# Altium PCB ESP_Grow_Main_Rev_B.PcbDoc (part 2 of 2)
Units mm, origin at the board's own origin, x right, y up, seen from the top; angles counter-clockwise.
Board outline 80 x 80 mm, 4 copper layers (Top Copper, GND, Power, Bottom Copper), stack 1.57 mm thick; 66 components, 30 nets, 190 pads, 293 vias.
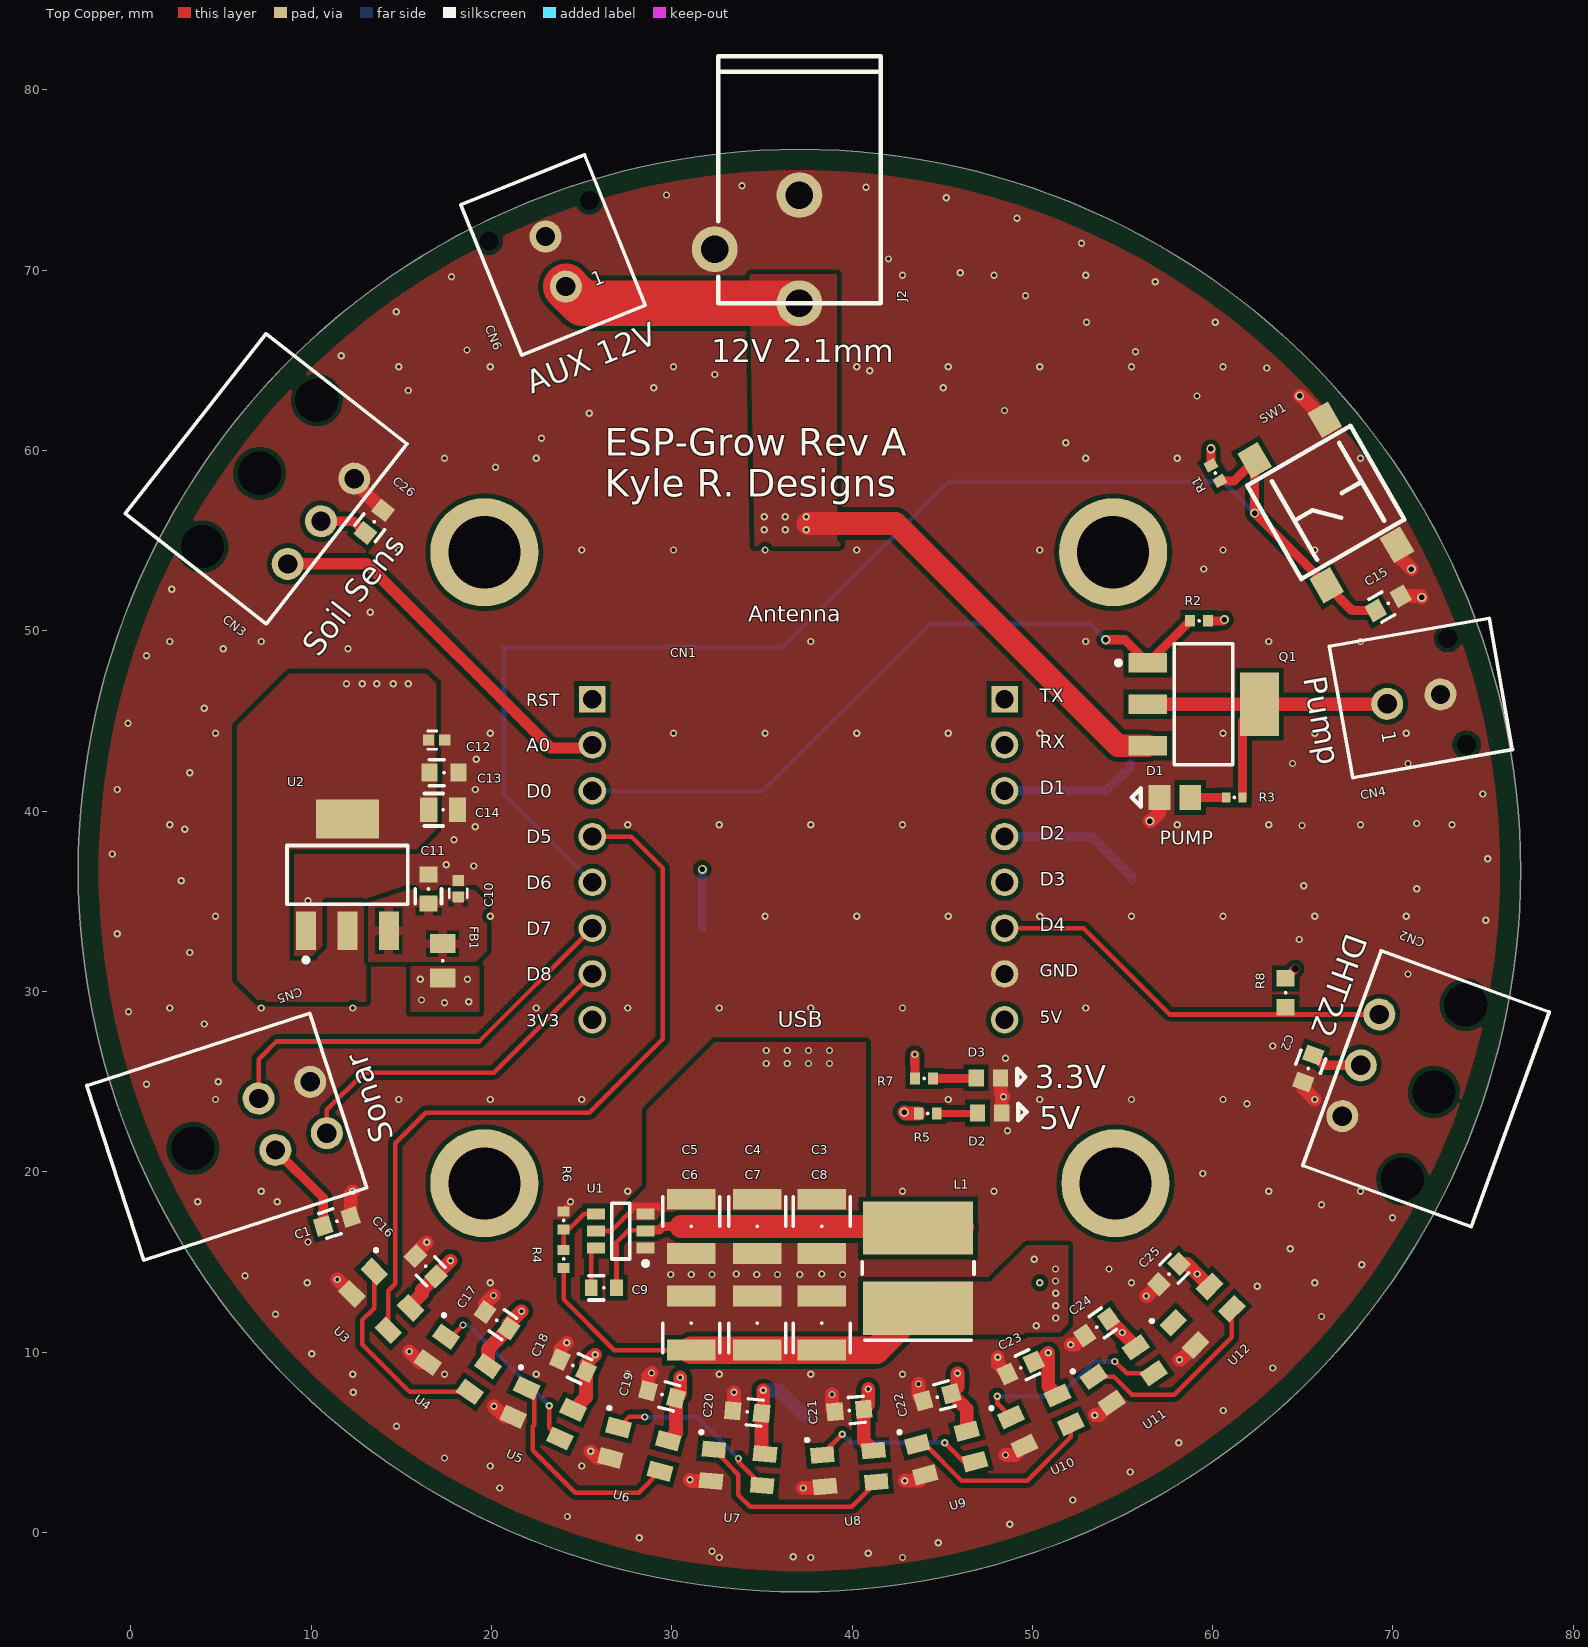
[diagram p0: Top Copper view]

## Silkscreen, mask and mechanical layers (free items; w line width, h text height) (continued)
Mechanical 1: (continued)
  text "1.38mil" at 42.34,93.662 h1.52
  text "10" at -13.525,90.614 h1.52
  text "Bottom Mask" at -3.114,90.614 h1.52
  text "Solder Resist" at 20.502,90.614 h1.52
  text "0.59mil" at 42.34,90.614 h1.52
  text "3.8" at 58.846,90.614 h1.52
  text "11" at -13.525,87.566 h1.52
  text "Bottom Overlay" at -3.114,87.566 h1.52
  text "10mm" at 62.55,-5.5 h1.52
Drill Drawing:
  circle w0.254: c-12.684,155.469 r0.508
  circle w0.254: c-12.684,155.469 r0.847
  circle w0.254: c-12.684,147.849 r0.847
  lines w0.254: -13.531,132.186 -13.107,132.186 -12.684,131.762 -12.261,132.186 -11.837,132.186 -12.261,132.609 -11.837,133.032 -12.261,133.032 -12.684,133.456 -13.107,133.032 -13.531,133.032 -13.107,132.609 -13.531,132.186 ; -13.531,135.996 -13.107,135.996 -13.107,135.572 -12.261,135.572 -12.261,135.996 -11.837,135.996 -11.837,136.842 -12.261,136.842 -12.261,137.266 -13.107,137.266 -13.107,136.842 -13.531,136.842 -13.531,135.996 ; -13.531,139.382 -11.837,139.382 -11.837,141.076 -13.531,141.076 -13.531,139.382 ; -13.531,143.192 -12.684,143.616 -11.837,143.192 -12.261,144.039 -11.837,144.886 -12.684,144.462 -13.531,144.886 -13.107,144.039 -13.531,143.192 ; -13.531,150.812 -13.531,151.236 -13.107,151.659 -13.531,152.082 -13.531,152.506 -13.107,152.506 -12.684,152.082 -12.261,152.506 -11.837,152.506 -11.837,152.082 -12.261,151.659 -11.837,151.236 -11.837,150.812 -12.261,150.812 -12.684,151.236 -13.107,150.812 -13.531,150.812 ; -13.531,159.279 -12.684,158.433 -11.837,159.279 -12.684,160.126 -13.531,159.279 ; -13.531,163.936 -11.837,163.936 -12.684,162.243 -13.531,163.936 ; -13.531,166.052 -11.837,166.052 -11.837,167.746 -13.531,167.746 -13.531,166.052 ; -13.192,166.391 -12.176,166.391 -12.176,167.407 -13.192,167.407 -13.192,166.391
  lines w0.381: -15.05,130.619 265.898,130.619 ; -15.05,168.719 265.898,168.719 ; -1.057,126.809 -1.057,172.529 ; 13.925,126.809 13.925,172.529 ; 43.126,126.809 43.126,172.529 ; 55.975,126.809 55.975,172.529 ; 74.614,126.809 74.614,172.529 ; 115.75,126.809 115.75,172.529 ; 130.732,126.809 130.732,172.529 ; 149.675,126.809 149.675,172.529 ; 175.322,126.809 175.322,172.529 ; 197.007,126.809 197.007,172.529 ; 230.881,126.809 230.881,172.529 ; -15.05,126.809 265.898,126.809 265.898,172.529 -15.05,172.529 -15.05,126.809
  text "Symbol" at -12.763,169.862 h1.83
  text "Count" at 0.086,169.862 h1.83
  text "Hole Size" at 15.068,169.862 h1.83
  text "Plated" at 44.269,169.862 h1.83
  text "Hole Type" at 57.118,169.862 h1.83
  text "Drill Layer Pair" at 75.757,169.862 h1.83
  text "Via/Pad" at 116.893,169.862 h1.83
  text "Pad Shape" at 131.875,169.862 h1.83
  text "Template" at 150.818,169.862 h1.83
  text "Description" at 176.465,169.862 h1.83
  text "Hole Tolerance (+)" at 198.15,169.862 h1.83
  text "Hole Tolerance (-)" at 232.024,169.862 h1.83
  text "1" at 0.086,166.052 h1.52
  text "0.406mm (16.00mil)" at 15.068,166.052 h1.52
  text "PTH" at 44.269,166.052 h1.52
  text "Round" at 57.118,166.052 h1.52
  text "Top Copper - Bottom Copper" at 75.757,166.052 h1.52
  text "Via" at 116.893,166.052 h1.52
  text "Rounded" at 131.875,166.052 h1.52
  text "v41h41" at 150.818,166.052 h1.52
  text "1" at 0.086,162.243 h1.52
  text "2.410mm (94.88mil)" at 15.068,162.243 h1.52
  text "NPTH" at 44.269,162.243 h1.52
  text "Round" at 57.118,162.243 h1.52
  text "Top Copper - Bottom Copper" at 75.757,162.243 h1.52
  text "Pad" at 116.893,162.243 h1.52
  text "Rounded" at 131.875,162.243 h1.52
  text "c0hn241" at 150.818,162.243 h1.52
  text "3" at 0.086,158.433 h1.52
  text "1.524mm (60.00mil)" at 15.068,158.433 h1.52
  text "PTH" at 44.269,158.433 h1.52
  text "Round" at 57.118,158.433 h1.52
  text "Top Copper - Bottom Copper" at 75.757,158.433 h1.52
  text "Pad" at 116.893,158.433 h1.52
  text "Rounded" at 131.875,158.433 h1.52
  text "c254h152" at 150.818,158.433 h1.52
  text "4" at 0.086,154.623 h1.52
  text "1.067mm (42.00mil)" at 15.068,154.623 h1.52
  text "NPTH" at 44.269,154.623 h1.52
  text "Round" at 57.118,154.623 h1.52
  text "Top Copper - Bottom Copper" at 75.757,154.623 h1.52
  text "Pad" at 116.893,154.623 h1.52
  text "Rounded" at 131.875,154.623 h1.52
  text "c0hn107" at 150.818,154.623 h1.52
  text "4" at 0.086,150.812 h1.52
  text "4.000mm (157.48mil)" at 15.068,150.812 h1.52
  text "PTH" at 44.269,150.812 h1.52
  text "Round" at 57.118,150.812 h1.52
  text "Top Copper - Bottom Copper" at 75.757,150.812 h1.52
  text "Pad" at 116.893,150.812 h1.52
  text "Rounded" at 131.875,150.812 h1.52
  text "c600h400(Tol0-0)" at 150.818,150.812 h1.52
  text "0.000mm (0.00mil)" at 198.15,150.812 h1.52
  text "0.000mm (0.00mil)" at 232.024,150.812 h1.52
  text "6" at 0.086,147.002 h1.52
  text "2.400mm (94.50mil)" at 15.068,147.002 h1.52
  text "NPTH" at 44.269,147.002 h1.52
  text "Round" at 57.118,147.002 h1.52
  text "Top Copper - Bottom Copper" at 75.757,147.002 h1.52
  text "Pad" at 116.893,147.002 h1.52
  text "Rounded" at 131.875,147.002 h1.52
  text "c0hn240" at 150.818,147.002 h1.52
  text "10" at 0.086,143.192 h1.52
  text "0.305mm (12.00mil)" at 15.068,143.192 h1.52
  text "PTH" at 44.269,143.192 h1.52
  text "Round" at 57.118,143.192 h1.52
  text "Top Copper - Bottom Copper" at 75.757,143.192 h1.52
  text "Via" at 116.893,143.192 h1.52
  text "Rounded" at 131.875,143.192 h1.52
  text "v51h30" at 150.818,143.192 h1.52
  text "14" at 0.086,139.382 h1.52
  text "1.067mm (42.00mil)" at 15.068,139.382 h1.52
  text "PTH" at 44.269,139.382 h1.52
  text "Round" at 57.118,139.382 h1.52
  text "Top Copper - Bottom Copper" at 75.757,139.382 h1.52
  text "Pad" at 116.893,139.382 h1.52
  text "Rounded" at 131.875,139.382 h1.52
  text "c178h107" at 150.818,139.382 h1.52
  text "16" at 0.086,135.572 h1.52
  text "1.016mm (40.00mil)" at 15.068,135.572 h1.52
  text "PTH" at 44.269,135.572 h1.52
  text "Round" at 57.118,135.572 h1.52
  text "Top Copper - Bottom Copper" at 75.757,135.572 h1.52
  text "Pad" at 116.893,135.572 h1.52
  text "(Mixed)" at 131.875,135.572 h1.52
  text "(Mixed)" at 150.818,135.572 h1.52
  text "282" at 0.086,131.762 h1.52
  text "0.203mm (8.00mil)" at 15.068,131.762 h1.52
  text "PTH" at 44.269,131.762 h1.52
  text "Round" at 57.118,131.762 h1.52
  text "Top Copper - Bottom Copper" at 75.757,131.762 h1.52
  text "Via" at 116.893,131.762 h1.52
  text "Rounded" at 131.875,131.762 h1.52
  text "v41h20" at 150.818,131.762 h1.52
  text "341 Total" at 0.086,127.953 h1.52

## Text inside footprints (layer, text, board x,y; h text height)
CN1: Top Overlay "D5" at 21.924,38.209 h0.76; Top Overlay "D0" at 21.924,40.749 h0.76; Top Overlay "3V3" at 21.924,28.049 h0.69; Top Overlay "D8" at 21.924,30.589 h0.76; Top Overlay "RST" at 21.924,45.829 h0.69; Top Overlay "A0" at 21.924,43.289 h0.76; Top Overlay "D6" at 21.924,35.669 h0.76; Top Overlay "D7" at 21.924,33.129 h0.76; Top Overlay "D2" at 50.412,38.409 h0.76; Top Overlay "D1" at 50.412,40.949 h0.76; Top Overlay "5V" at 50.412,28.249 h0.69; Top Overlay "TX" at 50.412,46.029 h0.76; Top Overlay "RX" at 50.412,43.489 h0.76; Top Overlay "D3" at 50.412,35.869 h0.76; Top Overlay "D4" at 50.412,33.329 h0.76; Top Overlay "GND" at 50.412,30.806 h0.69; Top Overlay "USB" at 35.875,28 h0.9; Top Overlay "Antenna" at 34.238,50.506 h0.9; Bottom Overlay "D2" at 52.055,38.409 h0.76; Bottom Overlay "GND" at 52.055,30.789 h0.69; Bottom Overlay "TX" at 52.055,46.029 h0.76; Bottom Overlay "RX" at 52.055,43.489 h0.76; Bottom Overlay "D3" at 52.055,35.869 h0.76; Bottom Overlay "D4" at 52.055,33.329 h0.76; Bottom Overlay "D1" at 52.055,40.949 h0.76; Bottom Overlay "5V" at 52.055,28.249 h0.69; Bottom Overlay "D5" at 23.21,38.309 h0.76; Bottom Overlay "D0" at 23.21,40.849 h0.76; Bottom Overlay "3V3" at 23.773,28.149 h0.69; Bottom Overlay "D8" at 23.21,30.689 h0.76; Bottom Overlay "RST" at 23.773,45.929 h0.69; Bottom Overlay "A0" at 23.21,43.389 h0.76; Bottom Overlay "D6" at 23.21,35.769 h0.76; Bottom Overlay "D7" at 23.21,33.229 h0.76
CN4: Top Overlay "1" at 69.352,44.369 h0.76 r280
CN6: Top Overlay "1" at 25.746,69.094 h0.76 r22